# EAGLE board xLIDAR_main_board_breakout.rev.a (EAGLE 9.0.1)
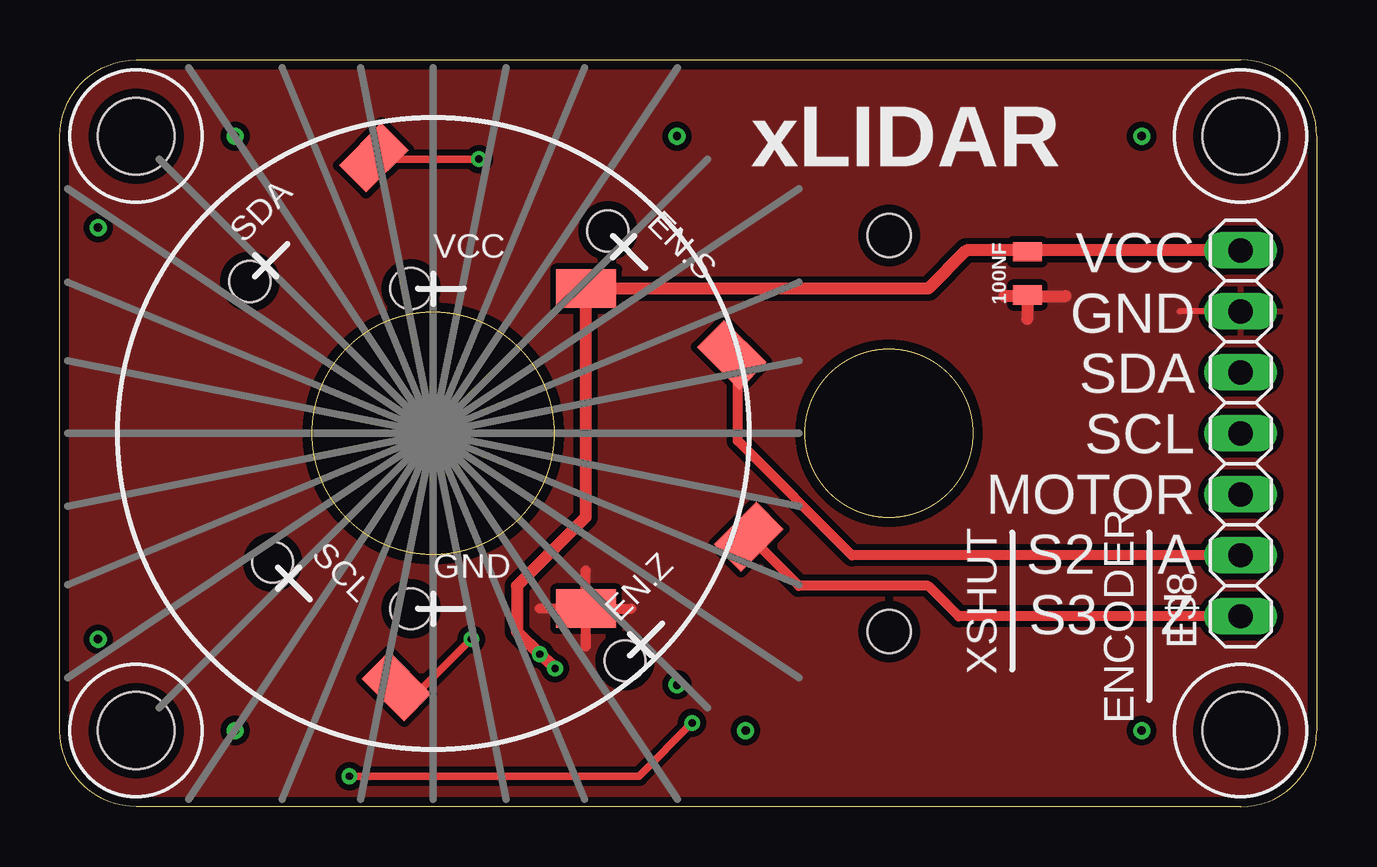
[diagram p0: board, top side]
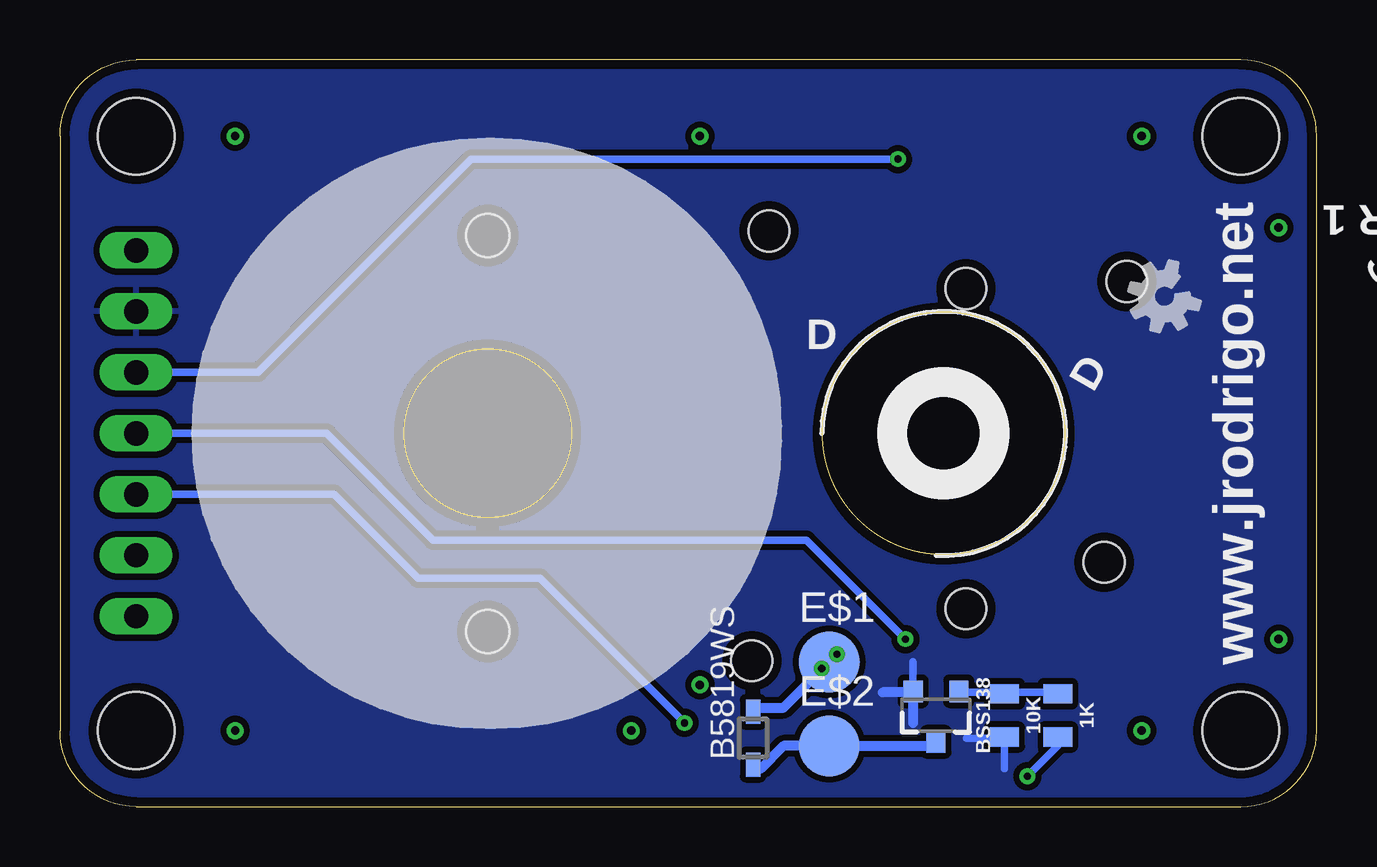
[diagram p1: board, bottom side, seen from below]

Size 52.39 x 31.11 mm. Coordinates in mm from the lower left corner, seen from the top.
Outline: 3.17,31.11 49.21,31.11 arc-90 52.39,27.94 52.39,3.17 arc-90 49.21,0 3.17,0 arc-90 0,3.17 0,27.94 arc-90 3.17,31.11
Outline: circle at 15.56,15.56 radius 5.05
Outline: circle at 34.56,15.56 radius 3.5
Copper layers (1*16): Top 0.0356mm / dielectric 1.5011mm / Bottom 0.0356mm
Design rules "oshpark-2layer *": minimum track width 6mil, minimum drill 13mil, track to track 6mil, track to pad 6mil, pad to pad 6mil, via to via 6mil, smd to smd 6mil, copper to edge 15mil, drill to drill 6mil, minimum pad ring 7mil, minimum via ring 7mil, stop-mask expansion 2.5mil, vias tented up to drill 50mil, thermal gap 10mil
Holes 1.8 mm at 34.56,7.31 34.56,23.81
Holes 3.2 mm at 49.21,27.94 3.17,3.17 3.17,27.94 49.21,3.17

## Footprints (pad centres in the part's own frame; a part is rotated, then mirrored left to right if it is on the bottom)
0805 = smd 0.8 x 1.2: 1 -0.9,0; 2 0.9,0
SOD323 = smd 1 x 0.6: 1 -1.1,0; 2 1.1,0
SOT23-3 = smd 0.8 x 0.9: 1 -0.95,-1; 2 0.95,-1; 3 0,1.1
B2,54 = smd 2.54 x 2.54: TP 0,0
1X07 = drill 1.016 long: 1 -7.62,0; 2 -5.08,0; 3 -2.54,0; 4 0,0; 5 2.54,0; 6 5.08,0; 7 7.62,0
BRUSH = smd 2.5 x 1.6: PAD 6.37,0 | hole 1.7: -0.93,0

## Placement (x,y rotation side)
1K  [0805]  10.79,3.81 270 bottom
10K  [0805]  13.02,3.81 270 bottom
100NF  [0805]  40.32,22.23 90 top
B5819WS  [SOD323]  23.49,2.86 90 bottom
BSS138  [SOT23-3]  15.88,3.81 180 bottom
E$1  [B2,54]  20.32,6.03 0 bottom
E$2  [B2,54]  20.32,2.54 0 bottom
E$7  [OSHW-LOGO-S]  6.35,21.27 120 bottom
E$8  [1X07]  49.21,15.56 90 top
EN.S  [BRUSH]  23.49,23.34 315 top
EN.Z  [BRUSH]  24.21,6.75 45 top
GND  [BRUSH]  15.56,8.25 0 top
SCL  [BRUSH]  9.52,9.52 315 top
SDA  [BRUSH]  8.57,22.54 45 top
VCC  [BRUSH]  15.56,21.59 0 top

## Library data of the parts
1K 10K = SparkFun-Resistors
100NF = SparkFun-Capacitors
B5819WS = zetex
BSS138 = SparkFun-DiscreteSemi
E$1 E$2 = testpad
E$7 = SparkFun-Aesthetics
E$8 = pinhead
EN.S EN.Z GND SCL SDA VCC = jrodrigo

## Nets
A: E$8.2
GND: E$8.6
S$1: E$2.TP
S$2: E$1.TP
S$3: E$8.3
S$4: E$8.4
S$5: E$8.5
VCC: E$8.7
Z: E$8.1

## Tracks (layer width: path | path; a pad name or v marks a point on that pad's centre or on a via)
A
  Top 0.406: E$8.2 33.02,10.48 28.26,15.24 28.26,18.73
GATE
  Bottom 0.305: 14.92,4.76 10.79,4.76
GND
  Top 0.254: E$8.6 46.67,20.64
  Top 0.406: 21.91,8.25 21.91,9.84 | 21.91,8.25 20,8.25 | 21.91,8.25 21.91,6.67 | 21.91,8.25 23.81,8.25
  Top 0.508: 40.32,21.27 40.32,20.32 | 40.32,21.27 41.91,21.27 | 40.32,21.27 39.37,21.27
  Bottom 0.305: 13.02,1.59 13.02,2.86 14.6,2.86 | 16.83,4.76 16.83,6.03
  Bottom 0.406: 18.1,4.76 16.83,4.76 16.83,3.49
  pour Bottom (isolate 0.254): 0,0 52.39,0 52.39,31.11 0,31.11
  pour Top (isolate 0.254): 5.71,0 0,0 0,14.29 0,31.11 40.32,31.11 52.39,31.11 52.39,7.62 52.39,0
S$1
  Bottom 0.406: 15.88,2.86 16.19,2.54 E$2.TP 22.23,2.54 23.18,1.59 23.5,1.59
S$2
  Bottom 0.406: 23.5,4.13 22.23,4.13 E$1.TP
S$3  (via drill 0.3)
  Top 0.305: v12.06,1.27 24.13,1.27 v26.35,3.49
  Bottom 0.305: E$8.3 40.96,13.02 37.46,9.53 32.39,9.53 v26.35,3.49 | v12.06,1.27 10.79,2.54 10.79,2.86
S$4  (via drill 0.3)
  Top 0.305: v17.14,6.99 14.92,4.76 13.97,4.76
  Bottom 0.305: v17.14,6.99 21.27,11.11 36.83,11.11 41.28,15.56 E$8.4
S$5  (via drill 0.3)
  Top 0.305: v17.46,26.99 13.02,26.99
  Bottom 0.305: E$8.5 44.13,18.1 35.24,26.99 v17.46,26.99
S$6  (via drill 0.35)
  other vias: 7.3,27.94
S$7  (via drill 0.35)
  other vias: 1.59,24.13
S$8  (via drill 0.35)
  other vias: 1.59,6.98
S$9  (via drill 0.35)
  other vias: 7.3,3.17
S$10  (via drill 0.35)
  other vias: 25.72,27.94
S$11  (via drill 0.35)
  other vias: 28.57,3.17
S$12  (via drill 0.35)
  other vias: 25.72,5.08
S$13  (via drill 0.35)
  other vias: 45.09,27.94
S$14  (via drill 0.35)
  other vias: 45.09,3.17
VCC  (via drill 0.3)
  Top 0.508: E$8.7 37.78,23.18 36.19,21.59 21.91,21.59 21.91,12.06 19.05,9.21 19.05,7.3 v20,6.35 20.69,5.76 v20.64,5.76
Z
  Top 0.406: E$8.1 37.46,7.94 36.19,9.21 30.8,9.21 28.58,11.43

## Text on the board
bNames: SENSOR 1 | D | SENSOR 3 | SENSOR 2 | D
tSilk: xLIDAR | VCC / GND / SDA / SCL / MOTOR / S2 A / S3 Z | XSHUT | ENCODER
bSilk: www.jrodrigo.net